# Altium PCB V2.1.PcbDoc (part 3 of 3)
Units mil, origin at the board's own origin, x right, y up, seen from the top; angles counter-clockwise.
Board outline 6653.54 x 3031.5 mil, 4 copper layers (Top Layer, 地, 电源, Bottom Layer); 355 components, 238 nets, 1139 pads, 340 vias.
Unrouted connection lines stored in the file: 1.
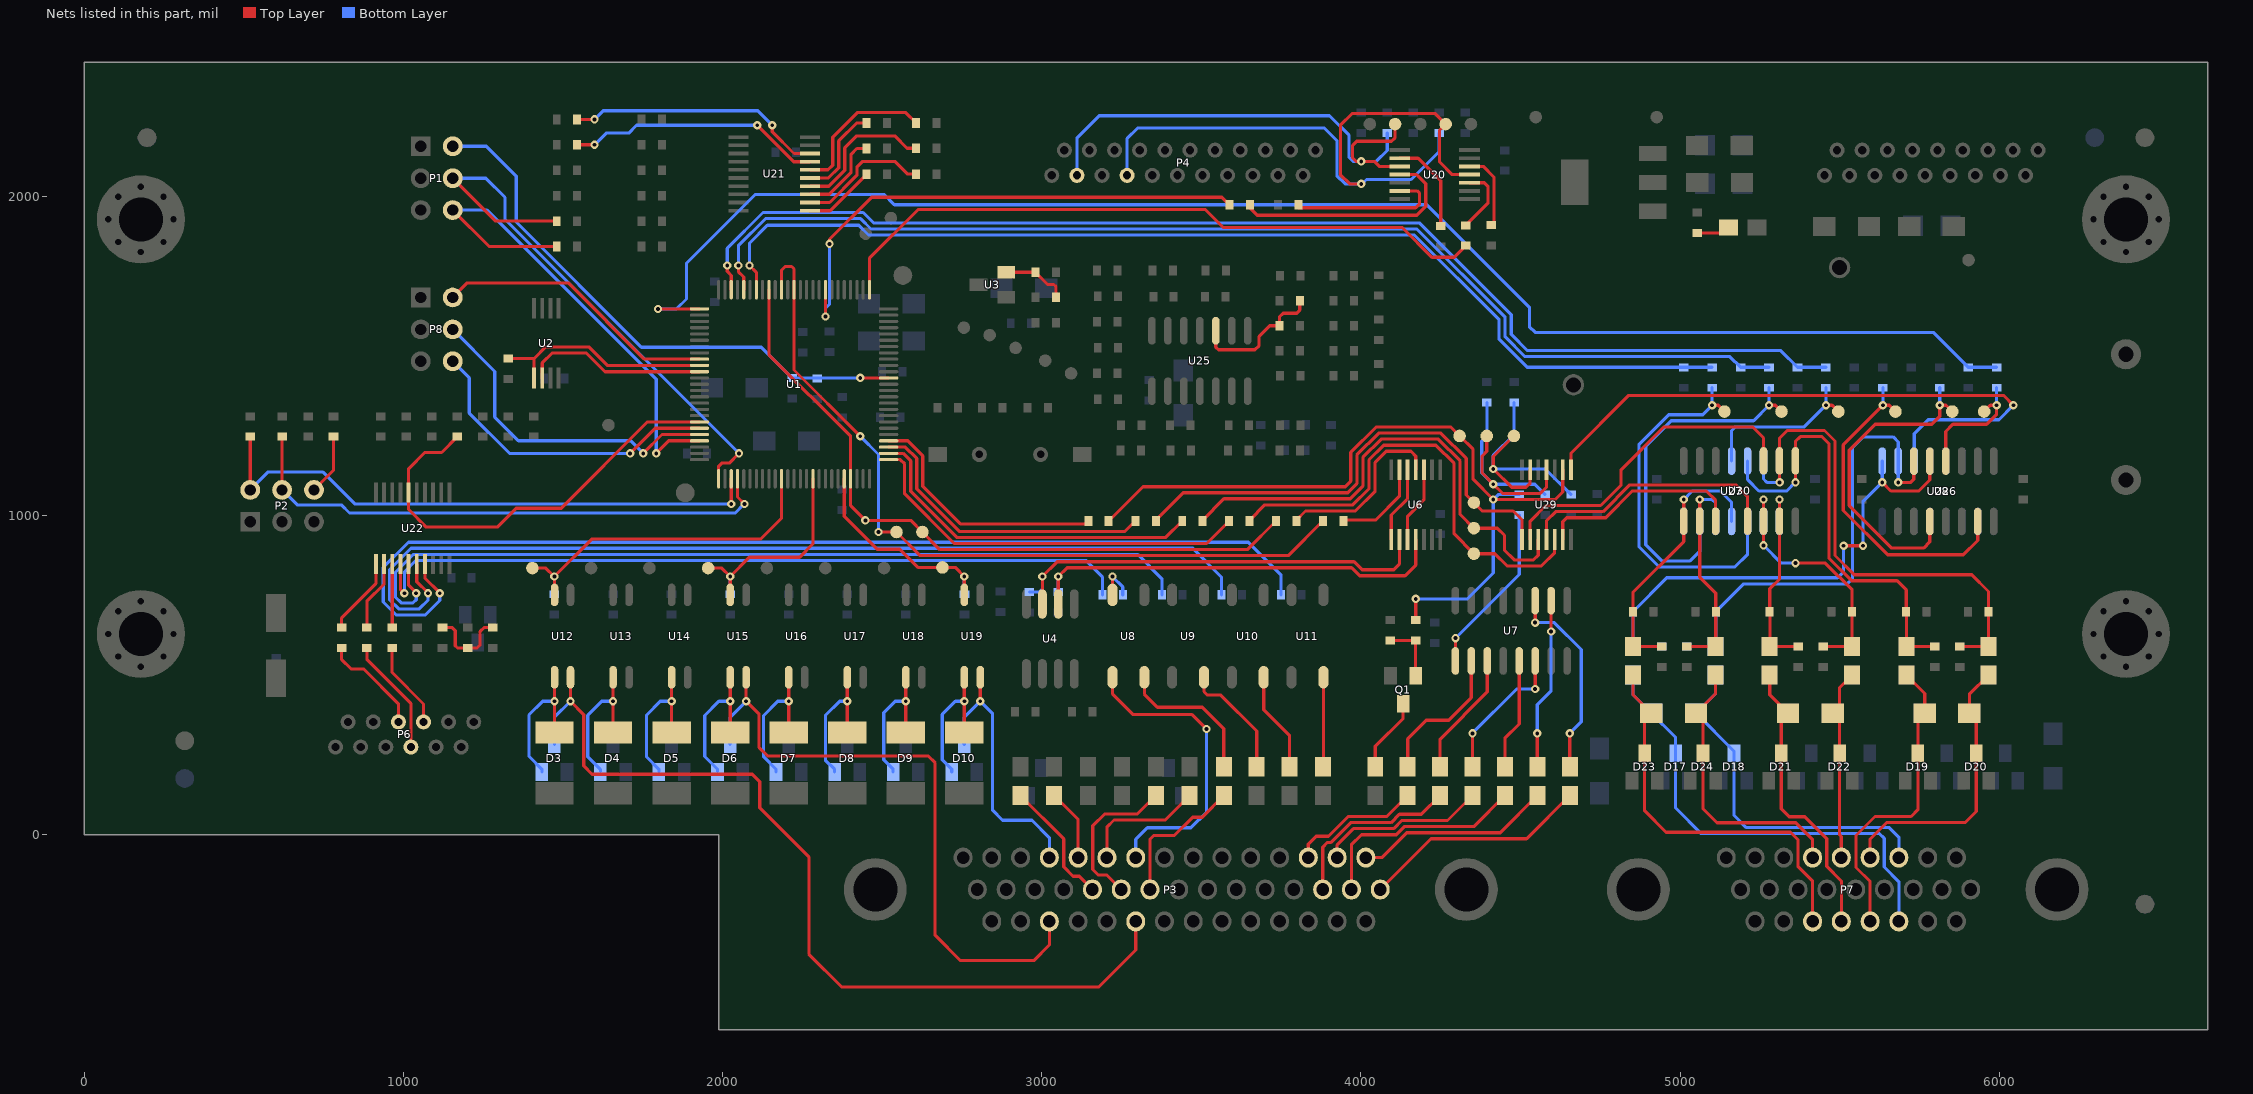
[diagram p5: the nets of this part, all layers, seen from the top]

## Via types
v1: diameter 26, hole 12, Top Layer to Bottom Layer, 308 vias
v2: diameter 38, hole 20, Top Layer to Bottom Layer, 32 vias

## Nets (pads, with @x,y where several pads share a name; then routed paths per layer and width w, separated by ;. In a path a pad name is that pad's centre, name@x,y a point inside that pad or via, vN(x,y) a via of type N, cw(c..) or ccw(c..) an arc to the next point about the centre after c; other vN are vias at no path point) (continued)
NetD3_2: D3.2 R36.1 U12.1 | length 466.5
  Top Layer w10: R36.1@1473.59,321.15 v1(1473.59,418.89) U12.1@1473.59,494.39
  Bottom Layer w10: D3.2@1433.85,197.39 1433.85,206.13 1393.59,246.39 1393.59,376.39 1436.09,418.89 v1(1473.59,418.89)
NetD4_2: D4.2 R38.1 U13.1 | length 464.8
  Top Layer w10: R38.1@1657.02,321.15 v1(1657.02,418.89) U13.1@1657.02,494.39
  Bottom Layer w10: D4.2@1617.28,197.39 1617.28,205.71 1577.59,245.39 1577.59,374.89 1621.59,418.89 v1(1657.02,418.89)
NetD5_2: D5.2 R40.1 U14.1 | length 464.3
  Top Layer w10: R40.1@1840.45,321.15 v1(1840.45,418.89) U14.1@1840.45,494.39
  Bottom Layer w10: D5.2@1800.71,197.39 1800.71,205.78 1761.59,244.89 1761.59,375.39 1805.09,418.89 v1(1840.45,418.89)
NetD6_2: D6.2 R42.1 U15.1 | length 465
  Top Layer w10: R42.1@2023.88,321.15 v1(2023.88,418.89) U15.1@2023.88,494.39
  Bottom Layer w10: D6.2@1984.14,197.39 1984.14,205.85 1944.09,245.89 1944.09,374.39 1988.59,418.89 v1(2023.88,418.89)
NetD7_2: D7.2 R44.1 U16.1 | length 463.5
  Top Layer w10: R44.1@2207.31,321.15 v1(2207.31,418.89) U16.1@2207.31,494.39
  Bottom Layer w10: D7.2@2167.57,197.39 2167.57,205.92 2128.59,244.89 2128.59,374.39 2173.09,418.89 v1(2207.31,418.89)
NetD8_2: D8.2 R46.1 U17.1 | length 449.3
  Top Layer w10: R46.1@2390.74,321.15 v1(2390.74,418.89) U17.1@2390.74,494.39
  Bottom Layer w10: D8.2@2351,197.39 2351,205.49 2322.09,234.39 2322.09,374.39 2366.59,418.89 v1(2390.74,418.89)
NetD9_2: D9.2 R48.1 U18.1 | length 454.9
  Top Layer w10: R48.1@2574.17,321.15 v1(2574.17,418.89) U18.1@2574.17,494.39
  Bottom Layer w10: D9.2@2534.43,197.39 2534.43,206.06 2505.09,235.39 2505.09,382.89 2541.09,418.89 v1(2574.17,418.89)
NetD10_2: D10.2 R50.1 U19.1 | length 451.8
  Top Layer w10: R50.1@2757.59,321.15 v1(2757.59,418.89) U19.1@2757.59,494.39
  Bottom Layer w10: D10.2@2717.85,197.39 2717.85,206.13 2688.59,235.39 2688.59,377.89 2729.59,418.89 v1(2757.59,418.89)
NetD12_1: D12.1 R93.2 | length 80.5
  Top Layer w10: R93.2@5054,1885.83 D12.1@5134.53,1885.83
NetP2_6: P2.6 R9.2 | length 191.8
  Top Layer w10: P2.6@720,1081.31 781,1142.31 R9.2@781,1247.89
NetQ1_1: Q1.1 R30.1 R31.1 | length 190
  Top Layer w10: R31.1@4092.59,609.39 R30.1@4171.59,609.39 Q1.1@4171.59,498.39
NetQ1_3: Q1.3 R29.2 | length 234.2
  Top Layer w10: R29.2@4045.09,213.65 4045.09,277.89 4132.22,365.02 Q1.3@4132.22,411.78
NetR11_1: R11.1 U20.2 | length 299
  Top Layer w10: U20.2@4121.75,2120.5 4179.32,2120.5 4250,2049.81 R11.1@4250,1908.31
NetR20_1: R20.1 U20.4 | length 736.3
  Top Layer w10: R20.1@3652,1965.31 3675.5,1941.81 4174.87,1941.81 4203,1969.94 4203,2040.81 4174.5,2069.31 U20.4@4121.75,2069.31
NetR21_2: R21.2 U6.6 | length 289.7
  Top Layer w10: R21.2@3945,986.81 4046,986.81 4120.82,1061.63 U6.6@4120.82,1144.52
NetR22_2: R22.2 U6.4 | length 564.9
  Top Layer w10: R22.2@3798.12,986.81 3826.62,1015.31 3982.5,1015.31 4044.5,1077.31 4044.5,1167.31 4079.5,1202.31 4157,1202.31 4172,1187.32 U6.4@4172,1144.52
NetR23_1: R23.1 U7.2 | length 455.4
  Top Layer w10: R23.1@4146.68,213.65 4146.68,300.98 4205.09,359.39 4275.09,359.39 4346.09,430.39 U7.2@4346.09,545.41
NetR24_1: R24.1 U7.3 | length 393
  Top Layer w10: R24.1@4248.26,213.65 4248.26,300.56 4396.09,448.39 U7.3@4396.09,545.41
NetR25_1: R25.1 U7.6 | length 446.6
  Top Layer w10: R25.1@4349.59,213.9 v1(4349.59,318.39) ; v1(4546.09,457.39) U7.6@4546.09,545.41
  Bottom Layer w10: v1(4349.59,318.39) 4488.59,457.39 v1(4546.09,457.39)
NetR26_1: R26.1 U7.5 | length 350.3
  Top Layer w10: R26.1@4451.43,213.65 4451.43,303.23 4496.09,347.89 U7.5@4496.09,545.41
NetR27_1: R27.1 U7.10 | length 538.3
  Top Layer w10: R27.1@4552.59,214.07 v1(4552.59,318.39) ; v1(4596.09,637.39) U7.10@4596.09,734.38
  Bottom Layer w10: v1(4552.59,318.39) 4552.59,407.89 4596.09,451.39 v1(4596.09,637.39)
NetR28_1: R28.1 U7.11 | length 630.8
  Top Layer w10: v1(4546.09,665.39) U7.11@4546.09,734.38 ; R28.1@4654.59,213.65 v1(4654.59,318.39)
  Bottom Layer w10: v1(4546.09,665.39) 4606.42,665.39 4690.59,581.22 4690.59,354.39 v1(4654.59,318.39)
NetR32_1: R32.1 U8.4 | length 466.5
  Top Layer w10: U8.4@3321.59,494.39 3321.59,441.39 3362.59,400.39 3503.59,400.39 3570.59,333.39 R32.1@3570.59,213.65
NetR33_1: R33.1 U9.4 | length 373.4
  Top Layer w10: U9.4@3508.59,494.39 3508.59,449.39 3519.59,438.39 3561.09,438.39 3673.59,325.89 R33.1@3673.59,213.65
NetR34_1: R34.1 U10.4 | length 314.3
  Top Layer w10: U10.4@3695.59,494.39 3695.59,392.39 3776.59,311.39 R34.1@3776.59,213.65
NetR35_1: R35.1 U11.4 | length 279.7
  Top Layer w10: R35.1@3882.59,214.65 U11.4@3882.59,494.39
NetR57_1: R57.1 U21.18 | length 808.6
  Top Layer w10: R57.1@1544.12,2242.31 v1(1599,2242.31) ; v1(2155.5,2223.81) 2155.5,2203.68 2223.89,2135.29 U21.18@2274.2,2135.29
  Bottom Layer w10: v1(1599,2242.31) 1626,2269.31 2110,2269.31 v1(2155.5,2223.81)
NetR58_1: R58.1 U21.17 | length 802.5
  Top Layer w10: R58.1@1544.22,2162.81 v1(1599,2162.81) ; v1(2108.5,2223.81) 2222.61,2109.7 U21.17@2274.2,2109.7
  Bottom Layer w10: v1(1599,2162.81) 1635.5,2199.31 1706,2199.31 1730.5,2223.81 v1(2108.5,2223.81)
NetR62_1: R62.1 U21.16 | length 471.4
  Top Layer w10: U21.16@2274.2,2084.11 2330.46,2084.11 2345,2098.65 2345,2186.31 2422,2263.31 2574.17,2263.31 R62.1@2606.59,2230.89
NetR63_1: R63.1 U21.15 | length 298
  Top Layer w10: U21.15@2274.2,2058.52 2331.74,2058.52 2364,2090.78 2364,2174.81 2420.08,2230.89 R63.1@2451.59,2230.89
NetR64_1: R64.1 U21.14 | length 454.4
  Top Layer w10: U21.14@2274.2,2032.93 2333.02,2032.93 2383,2082.91 2383,2152.81 2420.5,2190.31 2539.5,2190.31 2577.92,2151.89 R64.1@2606.59,2151.89
NetR65_1: R65.1 U21.13 | length 270.1
  Top Layer w10: U21.13@2274.2,2007.34 2334.3,2007.34 2402,2075.04 2402,2131.81 2421.08,2150.89 R65.1@2451.59,2150.89
NetR66_1: R66.1 U21.12 | length 416.6
  Top Layer w10: U21.12@2274.2,1981.75 2335.58,1981.75 2421,2067.17 2421,2092.81 2438,2109.81 2541,2109.81 2579.92,2070.89 R66.1@2606.59,2070.89
NetR74_1: R74.1 U21.11 | length 224.9
  Top Layer w10: U21.11@2274.2,1956.16 2336.86,1956.16 R74.1@2451.59,2070.89
NetR75_2: R75.2 R76.2 R77.2 | length 263.4
  Top Layer w10: R75.2@1122.5,649.81 1153,649.81 1162.5,640.31 1162.5,592.81 1169.5,585.81 R76.2@1201.5,585.81 1230.5,585.81 1240.5,595.81 1240.5,637.81 1252.5,649.81 R77.2@1280.5,649.81
NetR86_1: R86.1 U22.17 | length 3405
  Top Layer w10: U22.17@1067.39,849.11 1067.39,805.11 1114,758.5 v1(1114,757.31)
  Bottom Layer w10: v1(1114,757.31) 1114,734.81 1068.5,689.31 977.76,689.31 937,730.07 937,838.31 1016,917.31 3647,917.31 3750,814.32 R86.1@3750,752.31
NetR87_1: R87.1 U22.16 | length 3093.9
  Top Layer w10: U22.16@1041.8,849.11 1041.8,793.7 1077,758.5 v1(1077,757.31)
  Bottom Layer w10: v1(1077,757.31) 1077,735.31 1050,708.31 985.63,708.31 956,737.94 956,830.44 1023.87,898.31 3473,898.31 3563.33,807.98 R87.1@3563.33,752.31
NetR88_1: R88.1 U22.15 | length 2782.8
  Top Layer w10: U22.15@1016.2,849.11 1016.2,782.29 1040,758.5 v1(1040,757.31)
  Bottom Layer w10: v1(1040,757.31) 1040,737.31 1030,727.31 993.5,727.31 975,745.81 975,822.57 1031.74,879.31 3300.5,879.31 3376.67,803.15 R88.1@3376.67,752.31
NetR89_1: R89.1 U22.14 | length 2443.3
  Top Layer w10: U22.14@990.61,849.11 990.61,769.7 v1(1003,757.31)
  Bottom Layer w10: v1(1003,757.31) 1003,823.7 1039.61,860.31 3138.5,860.31 3190,808.81 R89.1@3190,752.31
NetR90_1: R90.1 U22.13 | length 199.5
  Top Layer w10: R90.1@964.5,649.81 965.02,650.34 U22.13@965.02,849.11
NetR91_1: R91.1 U22.12 | length 221.6
  Top Layer w10: R91.1@885.5,649.81 885.5,732.44 939.43,786.38 U22.12@939.43,849.11
NetR92_1: R92.1 U22.11 | length 243.8
  Top Layer w10: R92.1@806.5,649.81 806.5,680.31 913.84,787.66 U22.11@913.84,849.11
NetR95_2: R95.2 R96.2 U3.2 | length 208.8
  Top Layer w10: U3.2@2888.5,1763.06 2980.24,1763.06 3018.48,1724.81 3038.5,1724.81 3044.5,1718.81 R96.2@3044.5,1684.31
NetR111_1: R111.1 R112.2 U25.10 | length 431.4
  Top Layer w10: U25.10@3545.5,1579.8 3545.5,1528.81 3554,1520.31 3668,1520.31 3681,1533.31 3681,1562.31 3714.19,1595.51 R112.2@3744.66,1595.51 3744.66,1622.97 3756.5,1634.81 3799,1634.81 3808.66,1644.47 R111.1@3808.66,1673.66
NetR120_1: R120.1 TP14.1 U26.3 | length 1017
  Top Layer w10: U26.3@5782.59,982.41 5782.59,918.28 5763.13,898.81 5663.63,898.81 5530.5,1031.94 5530.5,1205.81 5611.5,1286.81 5788.5,1286.81 5813.8,1312.11 v1(5813.8,1346.31) 5833.5,1346.31 TP14.1@5853,1326.81
  Bottom Layer w10: v1(5813.8,1346.31) R120.1@5813.8,1401.21
NetR122_1: R122.1 TP16.1 U26.6 | length 1040.1
  Top Layer w10: TP16.1@5675,1326.81 5655.5,1346.31 v1(5635.6,1346.31) 5511.5,1222.22 5511.5,1016.81 5650.5,877.81 5887.63,877.81 5932.59,922.78 U26.6@5932.59,982.41
  Bottom Layer w10: v1(5635.6,1346.31) R122.1@5635.6,1401.14
NetR123_1: R123.1 TP15.1 U26.11 | length 404.8
  Top Layer w10: U26.11@5832.59,1171.38 5832.59,1264.41 5855,1286.81 5960.5,1286.81 5992,1318.31 v1(5992,1346.31) 5972.5,1346.31 TP15.1@5953,1326.81
  Bottom Layer w10: v1(5992,1346.31) R123.1@5992,1401.28
NetR126_1: R126.1 TP17.1 U27.3 | length 1187.6
  Top Layer w10: v1(5100.63,1346.31) 5119.5,1346.31 TP17.1@5139,1326.81
  Bottom Layer w10: R126.1@5100.63,1401.31 v1(5100.63,1346.31) 5071.13,1316.81 4964.63,1316.81 4871,1223.18 4871,904.07 4935.26,839.81 5171.63,839.81 5211.59,879.78 U27.3@5211.59,982.41
NetR128_1: R128.1 TP19.1 U27.6 | length 1146.3
  Top Layer w10: v1(5278.89,1346.31) 5298.5,1346.31 TP19.1@5318,1326.81
  Bottom Layer w10: U27.6@5061.59,982.41 5061.59,888.78 5031.63,858.81 4943.13,858.81 4892.5,909.44 4892.5,1217.81 4972.5,1297.81 5230.39,1297.81 v1(5278.89,1346.31) R128.1@5278.89,1401.31
NetR129_1: R129.1 TP18.1 U27.11 | length 526.2
  Top Layer w10: v1(5457.16,1346.31) 5476.5,1346.31 TP18.1@5496,1326.81
  Bottom Layer w10: U27.11@5161.59,1171.38 5161.59,1267.41 5173,1278.81 5389.66,1278.81 v1(5457.16,1346.31) R129.1@5457.16,1401.31
NetR135_2: R135.2 U20.12 | length 244.4
  Top Layer w10: U20.12@4340.25,2094.91 4383.41,2094.91 4417,2061.31 4417,1920.31 R135.2@4408,1911.31
NetR138_1: R138.1 U20.6 | length 482.2
  Top Layer w10: R138.1@3805,1965.31 4171.5,1965.31 4184,1977.81 4184,2010.31 4176.18,2018.13 U20.6@4121.75,2018.13
NetR140_2: R140.2 U20.10 | length 213.3
  Top Layer w10: R140.2@4329,1910.31 4398,1979.31 4398,2032.81 4387.09,2043.72 U20.10@4340.25,2043.72
NetR152_1: R152.1 TP6.1 U29.12 | length 1450.8
  Top Layer w10: R152.1@3651.25,986.81 3698.75,1034.31 3974.63,1034.31 4025.5,1085.18 4025.5,1175.18 4071.63,1221.31 4235,1221.31 4292,1164.31 4292,943.31 TP6.1@4354,881.31 4420,881.31 4458.5,842.81 4565.5,842.81 4607.19,884.5 U29.12@4607.19,926.02
NetR154_2: R154.2 R159.2 TP4.1 U29.4 | length 866.8
  Top Layer w10: TP4.1@4394.5,1250.31 4394.5,1201.81 4379.5,1186.81 4379.5,1134.56 v1(4415,1099.06) 4443.75,1070.31 4562.5,1070.31 4581.59,1089.41 U29.4@4581.59,1144.52
  Bottom Layer w10: R159.2@4395,1354.81 4395,1250.31 4379,1234.31 4379,1135.06 v1(4415,1099.06) 4544.74,1099.06 R154.2@4577.33,1066.47
NetR157_1: R157.1 TP7.1 U29.10 | length 1547.1
  Top Layer w10: R157.1@3504.38,986.81 3570.88,1053.31 3966.76,1053.31 4006.5,1093.06 4006.5,1183.06 4063.76,1240.31 4242.87,1240.31 4311,1172.18 4311,1004.31 TP7.1@4354,961.31 4427.5,961.31 4450,938.81 4450,892.31 4480.5,861.81 4541,861.81 4556,876.82 U29.10@4556,926.02
NetR160_1: R160.1 TP8.1 U29.8 | length 1554.2
  Top Layer w10: R160.1@3357.5,986.81 3443,1072.31 3958.89,1072.31 3987.5,1100.93 3987.5,1190.93 4055.89,1259.31 4250.74,1259.31 4330,1180.06 4330,1065.31 TP8.1@4354,1041.31 4380,1015.31 4477,1015.31 4504.82,987.49 U29.8@4504.82,926.02
NetR163_2: R163.2 R169.2 TP5.1 U29.6 | length 829
  Top Layer w10: TP5.1@4479.5,1250.31 4415,1185.81 v1(4415,1146.81) 4472.5,1089.31 4517.5,1089.31 4530.41,1102.23 U29.6@4530.41,1144.52
  Bottom Layer w10: R169.2@4480,1354.81 4480,1254.31 4415,1189.31 v1(4415,1146.81) 4578.33,1146.81 R163.2@4658.67,1066.47
NetU6_3: U6.3 U6.10 | length 239.7
  Top Layer w10: U6.10@4146.41,926.02 4146.41,999.22 4197.59,1050.41 U6.3@4197.59,1144.52
NetU6_5: U6.5 U6.8 | length 239.7
  Top Layer w10: U6.8@4095.23,926.02 4095.23,1002.54 4146.41,1053.72 U6.5@4146.41,1144.52
NRST: C1.1 P1.2 R2.1 U1.14 | length 1749.8
  Top Layer w10: v1@2431.81,1432 U1.14@2520.26,1432
  Bottom Layer w10: P1.2@1154.5,2157.89 1259.42,2157.89 1353.5,2063.81 1353.5,1920.68 1745.87,1528.31 2121,1528.31 2217,1432.31 v1(2431.5,1432.31)
OA+: P3.16 R28.2 | length 716
  Top Layer w10: P3.16@4060.59,-170.79 4219.7,-11.68 4519.26,-11.68 R28.2@4654.59,123.65
OA-: P3.1 R27.2 | length 617.8
  Top Layer w10: P3.1@4015.71,-70.79 4065.78,-70.79 4143.89,7.32 4436.68,7.32 R27.2@4553.01,123.65
OB+: P3.17 R26.2 | length 685
  Top Layer w10: P3.17@3970.44,-170.79 3970.44,-30.76 4002.09,0.89 4110.59,0.89 4136.02,26.32 4354.09,26.32 R26.2@4451.43,123.65
OB-: P3.2 R25.2 | length 528
  Top Layer w10: P3.2@3925.55,-70.79 3925.55,-31.15 3976.59,19.89 4102.59,19.89 4128.02,45.32 4271.51,45.32 R25.2@4349.84,123.65
OUT1: P6.6 R92.2 | length 328.3
  Top Layer w10: R92.2@806.5,585.81 806.5,549.5 836,520 875.5,520 984.25,411.25 P6.6@984.25,354.33
OUT2: P6.7 R91.2 | length 367.4
  Top Layer w10: R91.2@885.5,585.81 885.5,550.5 1023.62,412.38 P6.7@1023.62,275.59
OUT3: P6.8 R90.2 | length 272.3
  Top Layer w10: R90.2@964.5,585.81 964.5,509 1062.99,410.51 P6.8@1062.99,354.33
OV: P4.16 R55.1 TP10.1 U20.11 | length 2170.7
  Top Layer w10: v1(4001,2040.06) 3964.75,2040.06 3936,2068.81 3936,2223.31 3973.69,2261 4232.06,2261 TP10.1@4265.75,2227.31 4246.5,2208.06 4246.5,2109.31 4286.5,2069.31 U20.11@4340.25,2069.31
  Bottom Layer w10: P4.16@3267.72,2066.93 3267.72,2182.53 3300.5,2215.31 3885.87,2215.31 3925,2176.18 3925,2065.81 3950.75,2040.06 v1(4001,2040.06) 4003.93,2040.06 4017.68,2053.81 4157.5,2053.81 4245.2,2141.51 R55.1@4245.2,2199.31
OV_2_ARM: R140.1 U1.26 | length 2107.5
  Top Layer w10: U1.26@2460.22,1708.57 2460.22,1806.54 2614,1960.31 3511.63,1960.31 3568.13,1903.81 4129,1903.81 4222.5,1810.31 4293,1810.31 R140.1@4329,1846.31
OZ+: P3.18 R24.2 | length 567.5
  Top Layer w10: P3.18@3880.28,-170.79 3880.28,-38.42 3895.59,-23.11 3906.58,-23.11 3968.58,38.89 4094.72,38.89 4120.65,64.82 4189.43,64.82 R24.2@4248.26,123.65
OZ-: P3.3 R23.2 | length 416.4
  Top Layer w10: P3.3@3835.4,-70.79 3835.4,-28.8 3860.09,-4.11 3898.71,-4.11 3960.71,57.89 4080.92,57.89 R23.2@4146.68,123.65
PULS+: P3.26 R12.2 | length 399.3
  Top Layer w10: R12.2@2933.09,123.65 3069.09,-12.35 3069.09,-100.11 3098.09,-129.11 3117.34,-129.11 P3.26@3159.02,-170.79
PULS-: P3.11 R16.2 | length 225.5
  Top Layer w10: R16.2@3039.19,123.65 3114.14,48.71 P3.11@3114.14,-70.79
PULS_2_74LVC14: R14.1 U4.7 U6.9 | length 1402.5
  Top Layer w10: U4.7@3002.09,723.72 v1(3002.09,809.86) 3048.55,856.31 3978.87,856.31 4003.87,831.31 4103.5,831.31 4120.82,848.63 U6.9@4120.82,926.02
  Bottom Layer w10: R14.1@2961.55,761.31 2992.5,761.31 3002.09,770.91 v1(3002.09,809.86)
PULS_2_ARM: R21.1 TP25.1 U1.38 U1.40 | length 2510.4
  Top Layer w10: U1.40@2184.63,1708.57 2184.63,1769.44 2196.5,1781.31 2216.5,1781.31 2224,1773.81 U1.38@2224,1708.57 2224,1456.81 v1(2431.5,1249.31) ; v1(2488.5,949.31) TP25.1@2545,949.31 2619,875.31 3772.5,875.31 R21.1@3881,983.81
  Bottom Layer w10: v1(2431.5,1249.31) 2488.5,1192.31 v1(2488.5,949.31)
RIL: D10.3 P3.12 U19.2 | length 864.7
  Top Layer w10: v1(2807.59,418.89) U19.2@2807.59,494.39
  Bottom Layer w10: D10.3@2757.22,284.01 2757.22,368.52 v1(2807.59,418.89) 2846.09,380.39 2846.09,77.39 2877.09,46.39 2969.59,46.39 3023.98,-7.99 P3.12@3023.98,-70.79
RIL_2_ARM: R51.2 TP34.1 U1.96 U19.4 | length 684.1
  Top Layer w10: U1.96@2381.48,1116.06 2381.48,998.83 2485,895.31 2555,895.31 2612,838.31 TP34.1@2689,838.31 2729.05,838.31 v1(2757.5,809.86) U19.4@2757.5,752.36
  Bottom Layer w10: R51.2@2757.5,754.81 v1(2757.5,809.86)
RSTP: D6.3 P3.42 U15.2 | length 1989.4
  Top Layer w10: U15.2@2073.88,494.39 v1(2073.95,418.89) 2114.59,378.25 2114.59,273.89 2141.09,247.39 2644.59,247.39 2666.09,225.89 2666.09,-314.11 2745.59,-393.61 2975.09,-393.61 3023.98,-344.72 P3.42@3023.98,-270.79
  Bottom Layer w10: D6.3@2023.51,284.01 2023.51,368.45 v1(2073.95,418.89)
RSTP_2_ARM: R43.2 TP30.1 U1.91 U15.4 | length 698.5
  Top Layer w10: TP30.1@1955,836.31 1997.55,836.31 v1(2024,809.86) ; U15.4@2024,752.39 v1(2024,809.86) ; U1.91@2283.06,1116.06 2283.06,911.79 2241.27,870 2084.14,870 v1(2024,809.86)
  Bottom Layer w10: R43.2@2024,754.31 v1(2024,809.86)
RX: P2.4 R8.1 U1.79 | length 1744.6
  Top Layer w10: P2.4@620,1081.31 R8.1@620,1247.89 ; U1.79@2046.83,1116.06 2046.83,1058.98 v1(2068.5,1037.31)
  Bottom Layer w10: P2.4@620,1081.31 667,1034.31 805.5,1034.31 831,1008.81 2040,1008.81 v1(2068.5,1037.31)
SCL: U1.61 U2.6 | length 577.1
  Top Layer w10: U2.6@1434.95,1432.06 1434.95,1479.26 1466,1510.31 1573,1510.31 1631.63,1451.68 U1.61@1927.74,1451.68
SDA: R4.1 U1.60 U2.5 | length 698.5
  Top Layer w10: R4.1@1329.03,1492.67 1409.36,1492.67 ; U2.5@1409.36,1432.06 1409.36,1492.67 ; U1.60@1927.74,1471.37 1638.81,1471.37 1580.87,1529.31 1446,1529.31 1409.36,1492.67
SIGN+: P3.25 R19.2 | length 488.7
  Top Layer w10: P3.25@3249.18,-170.79 3203.68,-125.29 3177.28,-125.29 3160.09,-108.11 3160.09,28.89 3197.09,65.89 3299.74,65.89 R19.2@3357.49,123.65
SIGN-: P3.10 R17.2 | length 395.7
  Top Layer w10: P3.10@3204.29,-70.79 3204.29,24.59 3226.59,46.89 3386.84,46.89 R17.2@3463.59,123.65
SIGN_2_74LVC14: R15.1 U4.6 U6.11 | length 1370.4
  Top Layer w10: U4.6@3052.09,723.72 v1(3052.09,809.86) 3079.55,837.31 3971,837.31 3996,812.31 4138.5,812.31 4172,845.81 U6.11@4172,926.02
  Bottom Layer w10: R15.1@3052.09,761.31 v1(3052.09,809.86)
SIGN_2_ARM: R22.1 TP26.1 U1.42 U1.97 | length 2209.5
  Top Layer w10: U1.42@2145.26,1708.57 2145.26,1505.06 2401.17,1249.15 U1.97@2401.17,1116.06 2401.17,1032.15 v1(2447.5,985.81) 2589.5,985.81 TP26.1@2626,949.31 2681,894.31 3644.62,894.31 R22.1@3734.12,983.81
SOFT: P4.20 R53.1 TP12.1 U20.3 | length 1672.4
  Top Layer w10: v1@3998.07,2110.56 v1(4001,2110.56) ; TP12.1@4107.25,2227.31 4107.25,2185.06 4096,2173.81 3987,2173.81 3974,2160.81 3974,2121.31 3984.75,2110.56 v1(4001,2110.56) ; U20.3@4121.75,2094.91 4057.41,2094.91 4041.75,2110.56 v1(4001,2110.56)
  Bottom Layer w10: P4.20@3110.24,2066.93 3110.24,2183.05 3180.5,2253.31 3901.61,2253.31 3963,2191.93 3963,2122.81 3975.25,2110.56 v1(4001,2110.56) 4048.25,2110.56 4082.4,2144.71 R53.1@4082.4,2199.31
SOFT_2_ARM: R20.2 U1.33 | length 1648.8
  Top Layer w10: v1(2322.43,1624.81) U1.33@2322.43,1708.57 ; v1@2335,1851.56 2335,1866 2467.31,1998.31 3564,1998.31 R20.2@3588,1974.31
  Bottom Layer w10: v1(2322.43,1624.81) 2322.43,1649.74 2334.75,1662.06 2334.75,1851.91 v1(2335,1852.16) v1@2335,1852.5
SON: D3.3 P3.39 U12.2 | length 2831
  Top Layer w10: U12.2@1523.59,494.39 v1(1523.59,418.89) 1565.09,377.39 1565.09,216.39 1591.09,190.39 2093.59,190.39 2116.59,167.39 2116.59,85.22 2270.5,-68.68 2270.5,-373.01 2373.59,-476.11 3178.59,-476.11 3294.45,-360.25 P3.39@3294.45,-270.79
  Bottom Layer w10: D3.3@1473.22,284.01 1473.22,368.52 v1(1523.59,418.89)
SON_2_ARM: R37.2 TP27.1 U1.86 U12.4 | length 1103.2
  Top Layer w10: TP27.1@1404,836.31 1446.55,836.31 v1(1473,809.86) ; U12.4@1473,752.86 v1(1473,809.86) ; U1.86@2184.63,1116.06 2184.63,992.68 2118.95,927 1590.14,927 v1(1473,809.86)
  Bottom Layer w10: R37.2@1473,754.31 v1(1473,809.86)
SRDY: R82.1 U1.69 U22.6 | length 1393.3
  Top Layer w10: R82.1@1169.17,1247.89 1119.59,1198.31 1066.6,1198.31 1016.2,1147.92 U22.6@1016.2,1073.52 1016.2,1019.72 1071.11,964.81 1294.63,964.81 1353.63,1023.81 1494.37,1023.81 1764.76,1294.2 U1.69@1927.74,1294.2
SRDY+: P3.24 R32.2 | length 445.4
  Top Layer w10: P3.24@3339.33,-170.79 3339.33,-13.37 3351.09,-1.61 3415.72,-1.61 3473.22,55.89 3502.84,55.89 R32.2@3570.59,123.65
SRDY-: P3.9 U8.3 | length 967.1
  Top Layer w10: U8.3@3221.59,494.39 3221.59,442.89 3287.09,377.39 3471.09,377.39 v1(3516.59,331.89)
  Bottom Layer w10: P3.9@3294.45,-70.79 3294.45,-13.75 3331.09,22.89 3467.59,22.89 3516.59,71.89 v1(3516.59,331.89)
SRDY_2_OPTO: R89.2 U8.2 | length 128.5
  Top Layer w10: U8.2@3221.5,752.36 v1(3221.5,809.86)
  Bottom Layer w10: v1(3221.5,809.86) 3254,777.36 R89.2@3254,752.31
SWCLK: P1.4 R6.2 U1.76 | length 1796.2
  Top Layer w10: P1.4@1154.5,2057.89 1288.9,1923.49 R6.2@1480.5,1923.49 ; U1.76@1987.78,1116.06 1987.78,1155.72 1997.37,1165.31 2021,1165.31 v1(2051.5,1195.81)
  Bottom Layer w10: P1.4@1154.5,2057.89 1258.42,2057.89 1318.5,1997.81 1318.5,1928.81 v1(2051.5,1195.81)
SWDIO: P1.6 R5.1 U1.72 | length 1614.5
  Top Layer w10: P1.6@1154.5,1957.89 1268.5,1843.89 R5.1@1480.5,1843.89 ; v1(1792.17,1195.81) 1831.5,1235.15 U1.72@1927.74,1235.15
  Bottom Layer w10: P1.6@1154.5,1957.89 1262.42,1957.89 1792.17,1428.15 v1(1792.17,1195.81)
TX: P2.2 R7.1 U1.78 | length 1817.5
  Top Layer w10: P2.2@520,1081.31 R7.1@520,1247.89 ; v1(2027.15,1037.31) U1.78@2027.15,1116.06
  Bottom Layer w10: P2.2@520,1081.31 576.5,1137.81 747,1137.81 847.5,1037.31 v1(2027.15,1037.31)
U+: D19.3 P7.22 R161.2 R162.1 | length 939.1
  Top Layer w10: P7.22@5595.63,-270.79 5595.63,-145.82 5551.5,-101.68 5551.5,-1.68 5611,57.82 5724,57.82 5745.46,79.28 D19.3@5745.46,256.51 R161.2@5745.46,360.13 ; R162.1@5709.22,500.89 5766.72,443.39 R161.2@5766.72,381.39
U+_2_26LS32: C59.1 R162.2 R165.1 U27.12 U30.9 | length 1389.6
  Top Layer w10: v1(5361.59,1104.89) U30.9@5361.59,1172.38 5361.59,1232.89 5377.09,1248.39 5444.72,1248.39 5466.46,1226.65 5466.46,867.89 5537.96,796.39 5680.09,796.39 5708.59,767.89 R165.1@5708.59,699.89 ; R165.1@5709.22,699.26 R162.2@5709.22,590.89 C59.1@5797.94,590.89
  Bottom Layer w10: U27.12@5211.59,1171.38 5211.59,1113.39 5247.09,1077.89 5334.59,1077.89 v1(5361.59,1104.89)
U-: D20.3 P7.4 R158.1 R161.1 | length 857
  Top Layer w10: P7.4@5595.63,-70.79 5595.63,-12.55 5647,38.82 5893,38.82 5927.96,73.78 D20.3@5927.96,256.51 R161.1@5927.96,360.15 ; R161.1@5906.72,381.39 5906.72,441.02 R158.1@5966.59,500.89
U-_2_26LS32: C58.2 R156.2 R158.2 U27.13 U30.10 | length 1595.2
  Top Layer w10: U30.10@5311.59,1172.38 5311.59,1243.39 5335.59,1267.39 5452.59,1267.39 5485.46,1234.52 5485.46,875.76 5545.83,815.39 5914.09,815.39 5966.59,762.89 R156.2@5966.59,699.89 R158.2@5966.59,590.89 5965.94,590.23 C58.2@5876.59,590.23 ; v1(5312.09,1104.89) U30.10@5312.09,1171.88
  Bottom Layer w10: U27.13@5261.59,1171.38 5261.59,1115.39 5272.09,1104.89 v1(5312.09,1104.89)
U_2_ARM: R160.2 U1.3 | length 952
  Top Layer w10: U1.3@2520.26,1215.46 2572.98,1215.46 2608.5,1179.94 2608.5,1084.56 2741.74,951.31 3261,951.31 R160.2@3293.5,983.81
U_2_LVC14: U29.9 U30.11 | length 1024.9
  Top Layer w10: U29.9@4530.41,926.02 4530.41,983.1 4579.63,1032.31 4751.26,1032.31 4815.5,1096.56 4815.5,1144.81 4949,1278.31 5227.63,1278.31 5261.59,1244.35 U30.11@5261.59,1172.38
U_TEST_2_ARM: R129.2 R130.1 U1.48 | length 3860.6
  Top Layer w10: v1(2014.5,1784.31) 2014.5,1765.81 2027.15,1753.17 U1.48@2027.15,1708.57
  Bottom Layer w10: v1(2014.5,1784.31) 2014.5,1838.06 2126.76,1950.31 2440.5,1950.31 2473,1917.81 4183.39,1917.81 4471,1630.2 4471,1569.06 4522.24,1517.81 5315.53,1517.81 R130.1@5368.03,1465.31 R129.2@5457.16,1465.31
USB_DISCONNECT: P8.2 U1.59 | length 891
  Top Layer w10: P8.2@1154.5,1684.31 1200,1729.81 1516.5,1729.81 1755.26,1491.06 U1.59@1927.74,1491.06
USBDM: P8.6 U1.70 | length 990.1
  Top Layer w10: v1(1710.5,1195.81) 1789.2,1274.52 U1.70@1927.74,1274.52
  Bottom Layer w10: P8.6@1154.5,1484.31 1206.5,1432.31 1206.5,1321.81 1332.5,1195.81 v1(1710.5,1195.81)
USBDP: P8.4 U1.71 | length 1042.4
  Top Layer w10: v1(1751.33,1195.81) 1810.35,1254.83 U1.71@1927.74,1254.83
  Bottom Layer w10: P8.4@1154.5,1584.31 1286.5,1452.31 1286.5,1309.31 1360.5,1235.31 1711.83,1235.31 v1(1751.33,1195.81)
V+: D21.3 P7.23 R171.2 R172.1 | length 880.9
  Top Layer w10: R172.1@5280.97,500.89 5280.97,438.89 R171.2@5338.47,381.39 ; R171.2@5317.21,360.13 D21.3@5317.21,256.51 5317.21,82.1 5342,57.32 5391,57.32 5459.5,-11.18 5459.5,-98.18 5505.48,-144.16 P7.23@5505.48,-270.79
V+_2_26LS32: C61.1 R172.2 R173.1 U27.1 U30.7 | length 630.2
  Top Layer w10: R173.1@5281.09,699.89 5281.09,771.39 5311.59,801.89 U30.7@5311.59,983.41 v1(5311.59,1050.89) ; R173.1@5281.63,699.35 5281.63,590.23 C61.1@5370.59,590.23
  Bottom Layer w10: U27.1@5311.59,982.41 v1(5311.59,1050.89)
V-: D22.3 P7.5 R167.1 R171.1 | length 590
  Top Layer w10: P7.5@5505.48,-70.79 5505,-70.31 5505,-4.68 5499.96,0.35 D22.3@5499.96,256.51 5499.96,462.26 R167.1@5538.59,500.89
V-_2_26LS32: C60.2 R166.2 R167.2 U27.2 U30.6 | length 813.4
  Top Layer w10: v1(5261.59,907.39) U30.6@5261.59,983.41 v1(5261.59,1050.89) ; v1(5361.59,851.89) 5455.59,851.89 5539.09,768.39 R166.2@5539.09,699.89 ; C60.2@5448.59,590.23 R167.2@5537.94,590.23 ; R167.2@5538.59,590.89 R166.2@5538.59,699.39
  Bottom Layer w10: v1(5261.59,907.39) 5317.09,851.89 v1(5361.59,851.89) ; U27.2@5261.59,982.41 v1(5261.59,1050.89)
V_2_ARM: R157.2 U1.2 | length 1106.5
  Top Layer w10: U1.2@2520.26,1195.78 2565.8,1195.78 2589.5,1172.07 2589.5,1076.68 2733.87,932.31 3388.88,932.31 R157.2@3440.38,983.81
V_2_LVC14: U29.11 U30.5 | length 827.3
  Top Layer w10: U29.11@4581.59,926.02 4581.59,984.78 4610.13,1013.31 4759.13,1013.31 4842.71,1096.89 5175.05,1096.89 5211.59,1060.35 U30.5@5211.59,983.41
V_TEST_2_ARM: R125.1 R126.2 U1.44 | length 3414.1
  Top Layer w10: v1(2084.5,1784.31) 2105.89,1762.93 U1.44@2105.89,1708.57
  Bottom Layer w10: v1(2084.5,1784.31) 2084.5,1854.31 2140.5,1910.31 2426.76,1910.31 2457.26,1879.81 4167.65,1879.81 4433,1614.47 4433,1553.31 4521,1465.31 R126.2@5100.63,1465.31
W+: D23.3 P7.24 R179.2 R180.1 | length 1220.8
  Top Layer w10: R180.1@4852.72,500.89 4852.72,438.89 R179.2@4910.22,381.39 ; R179.2@4888.96,360.13 D23.3@4888.96,256.51 4888.96,75.35 4956,8.32 5346.17,8.32 5370.09,-15.61 5370.09,-99.61 5415.32,-144.83 P7.24@5415.32,-270.79
W+_2_26LS32: C63.1 R180.2 R181.1 U27.4 U30.1 | length 850.5
  Top Layer w10: R181.1@4852.59,699.89 4852.59,760.39 5011.59,919.39 U30.1@5011.59,983.41 v1(5011.59,1050.89) ; R181.1@4852.72,699.76 R180.2@4852.72,590.89 C63.1@4941.94,590.89
  Bottom Layer w10: v1(5011.59,1050.89) 5038.59,1077.89 5125.59,1077.89 5161.59,1041.89 U27.4@5161.59,982.41
W-: D24.3 P7.6 R178.1 R179.1 | length 861.9
  Top Layer w10: R179.1@5050.22,381.39 5111.2,442.37 R178.1@5111.2,500.89 ; R179.1@5071.96,359.65 D24.3@5071.96,256.51 5071.96,82.35 5116,38.32 5362.67,38.32 5415.32,-14.33 P7.6@5415.32,-70.79
W-_2_26LS32: C62.2 R174.2 R178.2 U27.5 U30.2 | length 682.1
  Top Layer w10: C62.2@5021.09,590.23 R178.2@5110.55,590.23 ; v1(5061.59,1050.89) U30.2@5061.59,983.41 5061.59,807.89 5112.09,757.39 R174.2@5112.09,699.89 R178.2@5112.09,591.78
  Bottom Layer w10: v1(5061.59,1050.89) 5101.59,1050.89 5111.59,1040.89 U27.5@5111.59,982.41
W_2_ARM: R152.2 U1.1 | length 1260.1
  Top Layer w10: U1.1@2520.26,1176.09 2557.22,1176.09 2570.5,1162.81 2570.5,1068.81 2726,913.31 3516.75,913.31 R152.2@3587.25,983.81
W_2_LVC14: U29.13 U30.3 | length 651.7
  Top Layer w10: U29.13@4632.77,926.02 4632.77,981.96 4645.13,994.31 4767,994.31 4850.58,1077.89 5082.05,1077.89 5111.59,1048.35 U30.3@5111.59,983.41
W_TEST_2_ARM: R127.1 R128.2 U1.46 | length 3638.2
  Top Layer w10: v1(2049.5,1784.31) 2049.5,1765.31 2066.52,1748.3 U1.46@2066.52,1708.57
  Bottom Layer w10: v1(2049.5,1784.31) 2049.5,1846.18 2134.63,1931.31 2432.63,1931.31 2465.13,1898.81 4175.52,1898.81 4452,1622.34 4452,1561.18 4514.37,1498.81 5156.26,1498.81 R127.1@5189.76,1465.31 R128.2@5278.89,1465.31
Z+: D17.3 P7.21 R151.2 R153.1 | length 1443.9
  Bottom Layer w10: R153.1@4852.72,500.89 4852.72,438.89 R151.2@4910.22,381.39 4986.22,305.39 D17.3@4986.22,256.51 4986.22,84.59 5066.5,4.32 5625,4.32 5640,-10.68 5640,-100.18 5685.79,-145.98 P7.21@5685.79,-270.79
Z+_2_26LS32: C55.1 R153.2 R155.1 U26.12 U28.9 | length 1576.5
  Top Layer w10: v1(5512.59,906.39) v1(5573.09,906.39) ; v1(5633.59,1104.89) 5660.59,1077.89 5748.09,1077.89 5782.59,1112.39 U26.12@5782.59,1171.38
  Bottom Layer w10: C55.1@4942.59,590.23 4853.38,590.23 4852.59,591.02 R155.1@4852.59,699.89 4958.59,805.89 5493.59,805.89 5512.59,824.89 v1(5512.59,906.39) ; v1(5573.09,906.39) 5573.09,1044.39 v1(5633.59,1104.89) U28.9@5633.59,1171.38
Z-: D18.3 P7.3 R149.1 R151.1 | length 1122.6
  Bottom Layer w10: R149.1@5111.2,500.89 5111.2,442.37 R151.1@5050.22,381.39 5169.22,262.39 D18.3@5169.22,256.51 5169.22,62.09 5208,23.32 5656,23.32 5685.79,-6.48 P7.3@5685.79,-70.79
Z-_2_26LS32: C54.2 R148.2 R149.2 U26.13 U28.10 | length 1482.1
  Top Layer w10: v1(5683.59,1104.89) 5723.09,1104.89 5732.59,1114.39 U26.13@5732.59,1171.38
  Bottom Layer w10: C54.2@5021.09,590.23 5110.55,590.23 5112.09,591.78 R148.2@5112.09,699.89 5199.09,786.89 5524.59,786.89 5540.59,802.89 5540.59,1214.39 5573.59,1247.39 5667.59,1247.39 5683.59,1231.39 U28.10@5683.59,1171.38 v1(5683.59,1104.89)
Z_2_26LS31: R143.1 U7.1 | length 540.3
  Top Layer w10: U7.1@4296.09,545.41 v1@4296.09,616.41
  Bottom Layer w10: v1@4297.5,616.81 v1(4296.5,616.81) 4496,816.31 R143.1@4496,1002.47
Z_2_ARM: R150.1 U1.4 | length 793.2
  Top Layer w10: U1.4@2520.26,1235.15 2580.17,1235.15 2627.5,1187.81 2627.5,1092.43 2745.11,974.81 3137,974.81 R150.1@3146,983.81
Z_2_LVC14: U28.11 U29.1 | length 1959.9
  Top Layer w10: U29.1@4658.37,1144.52 4658.37,1196.68 4839,1377.31 6013.5,1377.31 v1(6044.5,1346.31)
  Bottom Layer w10: U28.11@5733.59,1171.38 5733.59,1257.78 5777.13,1301.31 5999.5,1301.31 v1(6044.5,1346.31)
Z_2_OC: R30.2 R143.2 R150.2 TP3.1 U29.2 | length 2587.2
  Top Layer w10: R150.2@3210,983.81 3317.5,1091.31 3951.02,1091.31 3968.5,1108.8 3968.5,1198.8 4048.02,1278.31 ; 4149,1278.31 4048.02,1278.31 ; R30.2@4172,673.8 v1(4172,739.81) ; U29.2@4632.77,1144.52 4632.77,1074.59 4609.5,1051.31 v1(4415,1051.31) 4351.5,1114.81 4351.5,1208.31 TP3.1@4309.5,1250.31 4281.5,1278.31 4048.02,1278.31
  Bottom Layer w10: v1(4172,739.81) 4334,739.81 4415,820.81 v1(4415,1051.31) 4430.16,1066.47 R143.2@4496,1066.47
Z_TEST_2_ARM: R123.2 R124.1 U1.51 | length 4797.9
  Top Layer w10: v1(1798,1648.31) U1.51@1927.52,1648.31
  Bottom Layer w10: v1(1798,1648.31) 1855.76,1648.31 1887,1679.56 1887,1791.16 2103.15,2007.31 2506,2007.31 2538.5,1974.81 4207,1974.81 4528,1653.81 4528,1592.66 4545.85,1574.81 5793.33,1574.81 R124.1@5902.83,1465.31 R123.2@5991.96,1465.31
pads on no net: D1.2 D2.1 D3.1 D4.1 D5.1 D6.1 D7.1 D8.1 D9.1 D10.1 M1.1 M2.1 M3.1 M4.1 M5.1 M6.1 M7.1 M8.1 M9.1 M10.1 P2.5 P3.6 P3.21 P3.29 P3.30 P3.34 P3.35 P3.36 P3.43 P7.8 P7.18 U1.5 U1.7 U1.8 U1.9 U1.18 U1.39 U1.41 U1.43 U1.45 U1.47 U1.54 U1.55 U1.56 U1.73 U1.77 U1.80 U1.81 U1.89 U1.90 U1.98 U6.1 U6.2 U6.12 U6.13 U7.13 U7.14 U7.15 U20.8 U20.9 U22.2 U22.18 U26.8 U26.9 U26.10 U27.8 U27.9 U27.10 U28.13 U28.14 U28.15 U30.13 U30.14 U30.15 Y1.0

## Polygon pours and split planes (outlines as drawn)
5V on 电源 "Top Layer-No Net" (solid, remove dead copper, pour order 2): 4997,2303.15 6156.35,2303.15 6211.88,2247.62 6224.5,2235 6224.5,1979.5 6224.5,1527 6371.29,1380.21 6499.5,1252 6499.5,1010 6499.5,963.5 6338.5,802.5 6260,724 6260,250 6260,32 6216.5,-11.5 6056.5,-11.5 5983,-85 5983,-131.28 5983,-255.5 5905.5,-333 5217.5,-333 5189.73,-305.23 5189.73,-170.79 5235,-125.51 5235,-70.79 5235,-18.5 5221,-4.5 4060.5,-4.5 3983.5,72.5 3978.49,77.51 3978.49,632.51 3948,663 3436,663 1482.5,663 1406.5,587 1328,508.5 1328,490.94 1328,239.5 1239.5,151 617,151 617,151.33 414,354.33 414,1751.5 414,1761.65 955.5,2303.15 5880.5,2303.15
3V3 on 电源 "Top Layer-No Net" (solid, remove dead copper, pour order 4): 5035,2103 5353,2103 5395,2061 5395,1831.5 5376,1812.5 5315,1751.5 5184.5,1751.5 4161,1751.5 4099,1813.5 4090.5,1822 2648.5,1822 2511,1684.5 2511,1605.17 2511,1448 2536,1423 2538,1421 3015.5,1421 3026,1421 3040.5,1406.5 3040.5,1377.5 3055,1363 3291.5,1126.5 3595.5,1126.5 3967.5,1126.5 4056,1215 4735,1215 4783,1167 4783,834.5 4748,799.5 4126,799.5 4023,902.5 3925,1000.5 2584.5,1000.5 2503,1000.5 2460,957.5 2435,932.5 1404,932.5 1366,894.5 1366,711 1366,700 1342.5,676.5 1274,676.5 1254.5,696 1254.5,924 1208,970.5 885.5,970.5 845.5,1010.5 845.5,1205 818,1232.5 672,1232.5 637.5,1267 637.5,1361 666,1389.5 679,1402.5 922.5,1402.5 970,1450 970,1691 970,2103.5 995,2128.5 2066.5,2128.5 2154.5,2040.5 2154.5,1939.5 2188,1906 2424,1906 2516,1998 2536,2018 3129.5,2018 3907,2018 3961.5,1963.5 3967.5,1957.5 4212.5,1957.5 4236.5,1981.5 4236.5,2122 4292.5,2178 4619.5,2178 4960,2178 5035,2103
5VA on 电源 "Top Layer-No Net" (solid, remove dead copper, pour order 6): 5946,2205 6111,2205 6178,2138 6178,1818.5 6088,1728.5 5951,1591.5 5506,1591.5 4193,1591.5 4140,1538.5 4140,1433 4118,1411 3838,1131 3615,1131 3299.5,1131 3212,1218.5 3048,1382.5 3048,1406.5 3064.5,1423 3162,1423 3185,1446 3185,1813.5 3193,1821.5 3478.5,1821.5 4091,1821.5 4152.5,1760 4160.5,1752 4405.5,1752 5404,1752 5430.5,1778.5 5514,1862 5514,1937.5 5566,1989.5 5624,1989.5 5770.5,1989.5 5791.5,2010.5 5791.5,2082 5828.5,2119 5837.5,2128 5837.5,2163.5 5879,2205 5946,2205
3V3A on 电源 "Top Layer-No Net" (solid, remove dead copper, pour order 8): 2528.5,1702 2648.5,1822 3051.5,1822 3176.5,1822 3185,1813.5 3185,1446 3162,1423 2536,1423 2511,1448 2511,1684.5 2528.5,1702
COM+ on 电源 "Top Layer-No Net" (solid, remove dead copper, pour order 1000): 2888.55,-170.79 2873.5,-155.74 2873.5,-60 2873.5,47.5 2803,118 2790,131 2185,131 2130.5,131 2095.5,96 2083.5,84 2083.5,-81.5 2130,-128 2252.5,-128 2283.5,-128 2337.5,-74 2392.5,-19 2463,-19 2564,-19 2641,-96 2641,-145.5 2666.5,-171 2666.71,-170.79 2798.39,-170.79 2888.55,-170.79
GNDD on 地 "Top Layer-No Net" (solid, remove dead copper, pour order 11): 5069.5,2303.15 6156.35,2303.15 6220.5,2239 6220.5,1532.5 6412,1341 6499.5,1253.5 6499.5,964 6260,724.5 6260,307 6260,31.5 6216,-12.5 6056.5,-12.5 5984,-85 5984,-258 5908.5,-333.5 5297.72,-333.5 5235,-270.79 5279.89,-225.91 5279.89,-170.79 5279.89,-50.39 5240,-10.5 4237.5,-10.5 4185,-63 4160.5,-87.5 4160.5,-174 4097,-237.5 4042.5,-237.5 3676.52,-237.5 3609.81,-170.79 3609.81,-46.69 3647,-9.5 3895.5,-9.5 3966.5,61.5 3983,78 3983,151 3983,627 3907,703 1360.5,703 1329,671.5 1329,243 1302,216 1236.5,150.5 687.5,150.5 615,150.5 413,352.5 413,1756.65 959.5,2303.15 5062.5,2303.15 5088.5,2303.15
GNDA on 地 "Top Layer-No Net" (solid, remove dead copper, pour order 1001): 5885.83,2145.67 5846.46,2106.3 5846.46,2066.93 5770.53,1991 5619,1991 5558.5,1991 5513.5,1946 5513.5,1863 5470,1819.5 5403.5,1753 4232,1753 4164.5,1753 4093,1824.5 2650.5,1824.5 2517,1691 2414.5,1588.5 2353,1588.5 2337,1572.5 2337,1526.5 2337,1467 2353,1451 2440,1451 2457.5,1433.5 2471,1420 2537,1420 3010,1420 3079.5,1350.5 3300.5,1129.5 3523.5,1129.5 3840,1129.5 4016,1305.5 4142,1431.5 4142,1535.5 4142,1536.5 4193.5,1588 5951.5,1588 6182,1818.5 6182,2137.5 6114,2205.5 5945.66,2205.5 5885.83,2145.67
GNDD on Bottom Layer "Top Layer-No Net" (solid, remove dead copper, pour order 14): 1051,2303.15 961.65,2303.15 835.5,2177 415.5,1757 415.5,798 415.5,349 560.5,204 618,146.5 1236,146.5 1236,149 1324,237 1324,563 1384.5,623.5 1390.5,629.5 1722,629.5 3883.5,629.5 3902.5,610.5 4033.5,479.5 4033.5,375 4033.5,258 4293.5,-2 6228,-2 6260,30 6260,725.5 6448.5,914 6499.5,965 6499.5,1247 6219.5,1527 6219.5,1607 6219.5,2245.65 6162,2303.15 1048,2303.15
GNDA on Bottom Layer "Top Layer-No Net" (solid, remove dead copper, pour order 16): 3655.08,-70.79 3655.08,-270.79 3655.08,-315.08 3714.5,-374.5 4125,-374.5 4207,-292.5 4207,39.65 4207,46 4027,226 4027,953.28 4027,956 3874.06,1108.94 3870.5,1112.5 3870.5,1137.5 3883.5,1150.5 3961.5,1150.5 3998.5,1187.5 3998.5,1290.5 4157.5,1449.5 4157.5,1758.5 4089.5,1826.5 2654,1826.5 2530.81,1703.31 2529,1701.5 2529,1631.5 2501.5,1604 2500,1602.5 2428,1602.5 2369.69,1544.18 2369.69,1498.85 2369.69,1461.31 2379,1452 2420.6,1452 2440.5,1452 2465.18,1427.32 2472,1420.5 2718,1420.5 3013.5,1420.5 3303.5,1130.5 3304,1131 3600.5,1131 3694,1131 3789.5,1035.5 3913,912 3913,772 3913,164 3962,115 4081,-4 4081,-78.5 4081,-196 4063,-214 3833.33,-214 3790.12,-170.79 3790.12,-115.67 3745.24,-70.79 3655.08,-70.79
GNDD on Top Layer "Top Layer-No Net" (solid, remove dead copper, pour order 18): 986,2303.15 961.15,2303.15 934,2276 414.5,1756.5 414.5,1225.5 414.5,349.5 619,145 1232.5,145 1262,174.5 1324.5,237 1324.5,385 1324.5,564 1387.5,627 1427,666.5 1516.5,666.5 3885,666.5 3980.5,571 3980.5,97.5 4088,-10 6224,-10 6263,29 6263,732 6473.5,942.5 6500,969 6500,1188.5 6500,1244.5 6213,1531.5 6213,2230.15 6140,2303.15 962.5,2303.15

## Keep-outs
Keep-Out Layer:
  lines w7.87: 19.68,19.69 2007.87,19.69 2007.87,-551.18 6594.49,-551.18 6594.49,2303.15 19.68,2303.15 19.68,19.69

## Other copper
Top Layer:
  rectangle net 3V3: 4500.5,1789.31 4791.5,2281.31
Bottom Layer:
  rectangle net 3V3: 4519,1773.31 4983.5,2278.81

## Silkscreen, mask and mechanical layers (free items; w line width, h text height)
Top Overlay:
  lines w10: 3054,1060.81 2928,1060.81 2928,919.81 3053,919.81 3053,1059.81 3070,1076.81 3118,1076.81 3169.5,1128.31 3169.5,1284.31 ; 3146.5,1261.31 3169.5,1284.31 ; 3192.5,1261.31 3169.5,1284.31
  text "控制板V10.8" at 102.36,1535.43 h150
Bottom Overlay:
  rectangle: 177.17,1397.64 937.01,1751.97
Mechanical 1:
  the board outline again, w7.87